# Altium PCB hd-gs.PcbDoc
Units mil, origin at the board's own origin, x right, y up, seen from the top; angles counter-clockwise.
Board outline 1400 x 650 mil, 6 copper layers (Top, 2-GND, 3-SIG, 4-SIG, 5-GND, Bottom), stack 46.142 mil thick; 60 components, 39 nets, 225 pads, 132 vias.
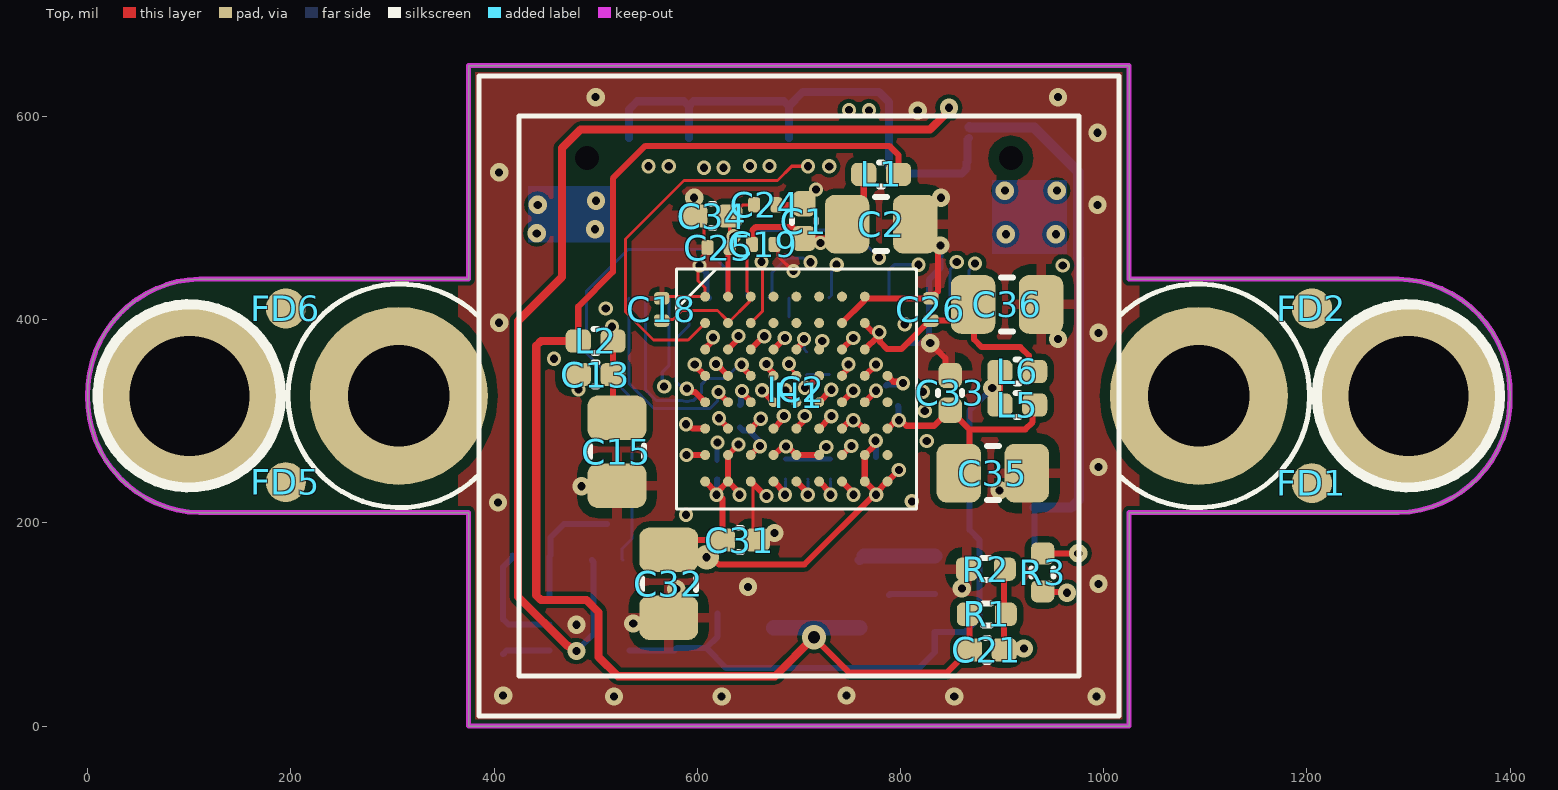
[diagram p0: Top view]
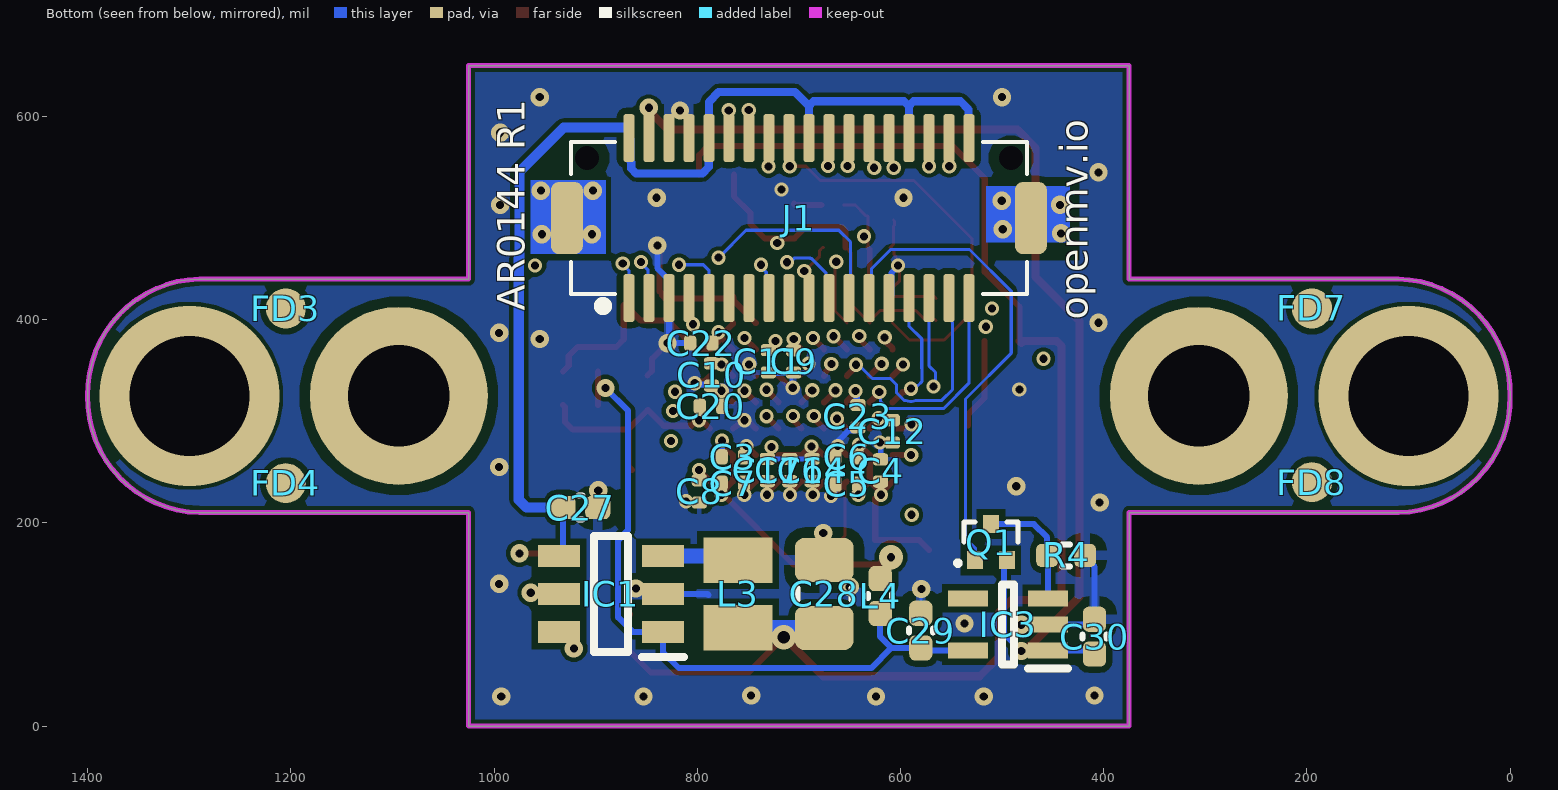
[diagram p1: Bottom view, seen from below]
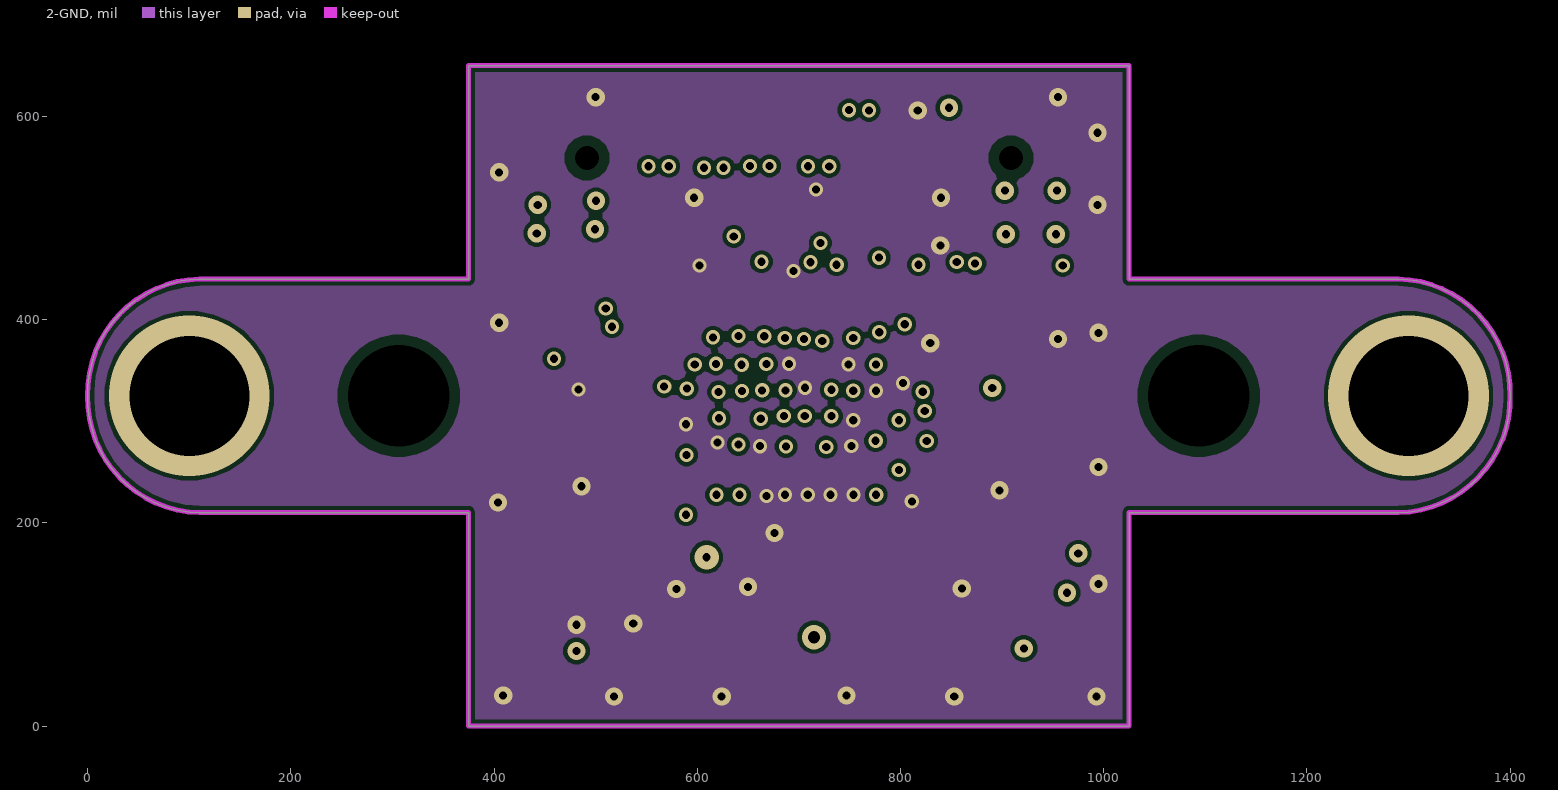
[diagram p2: 2-GND]
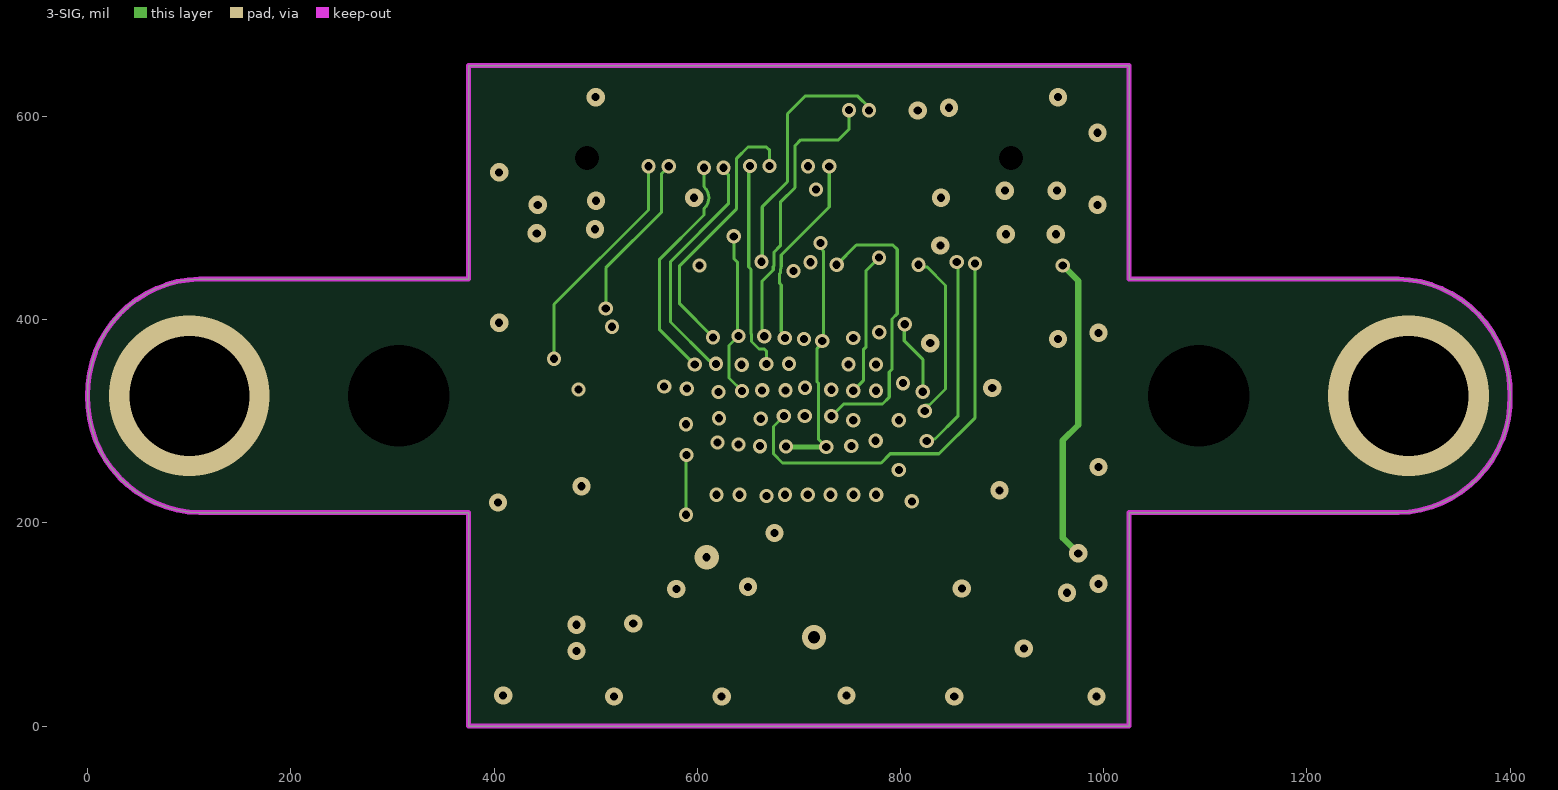
[diagram p3: 3-SIG]
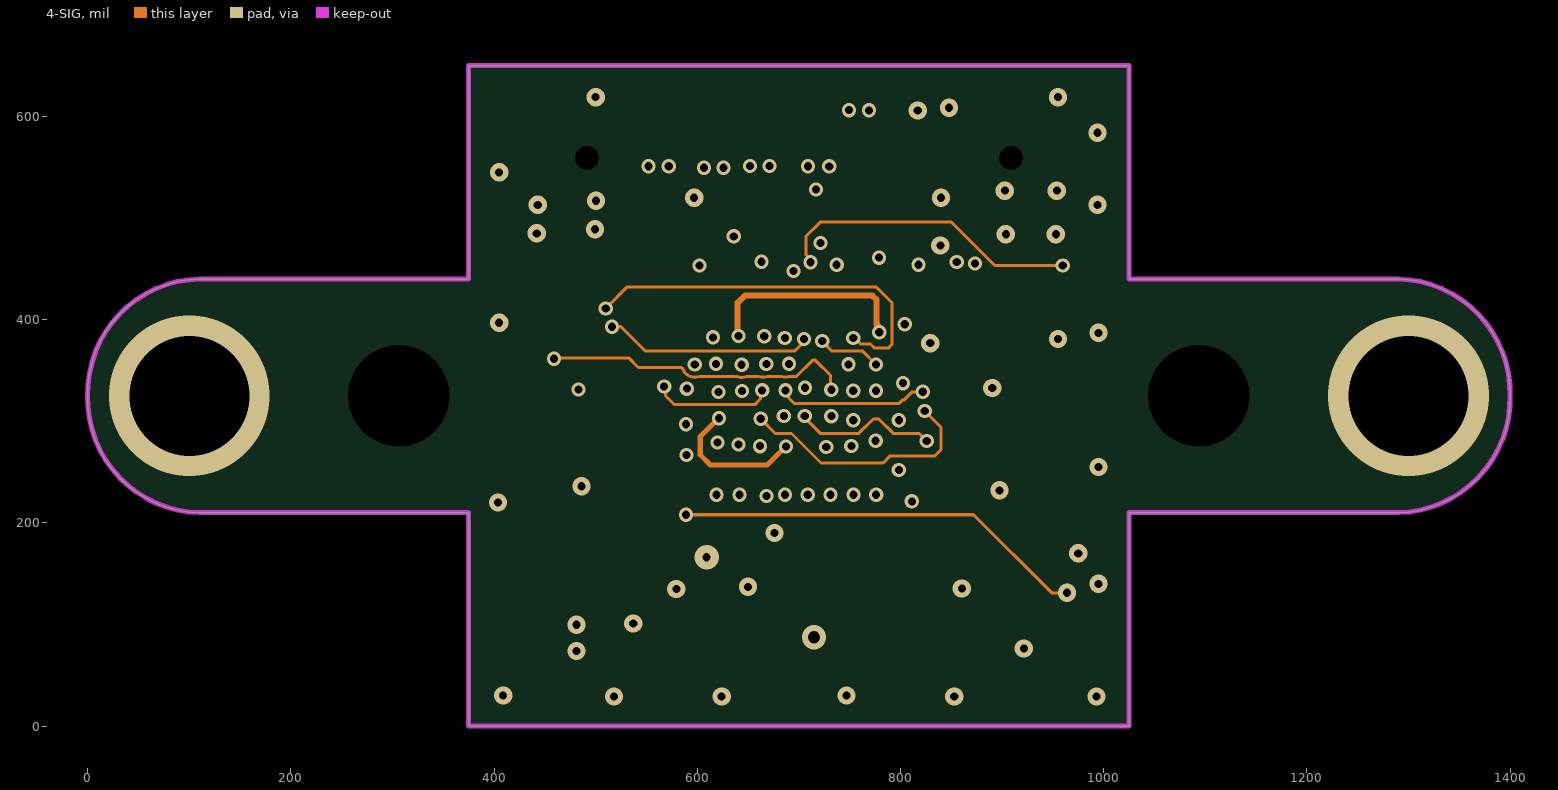
[diagram p4: 4-SIG]
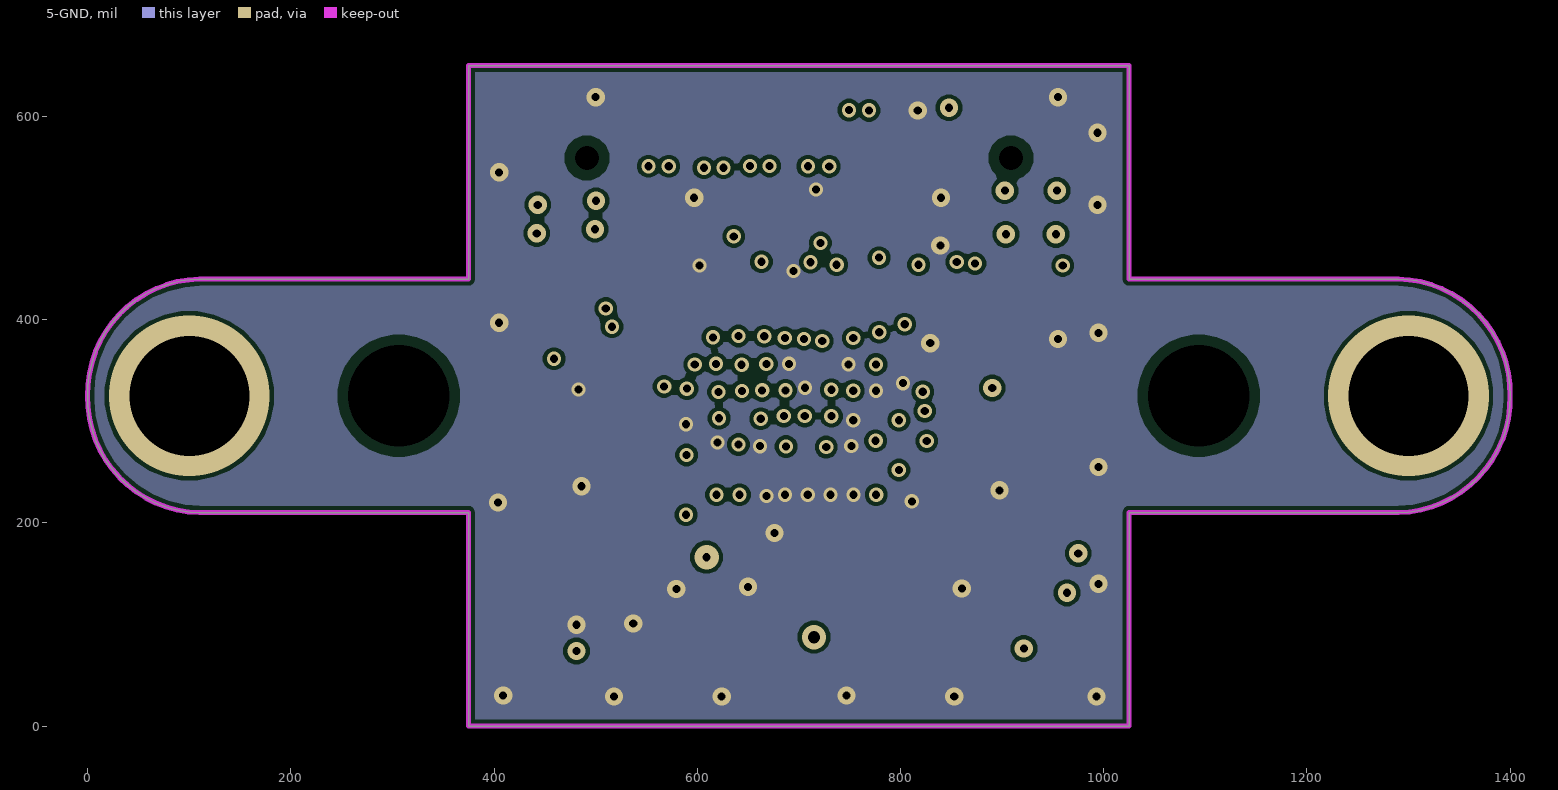
[diagram p5: 5-GND]
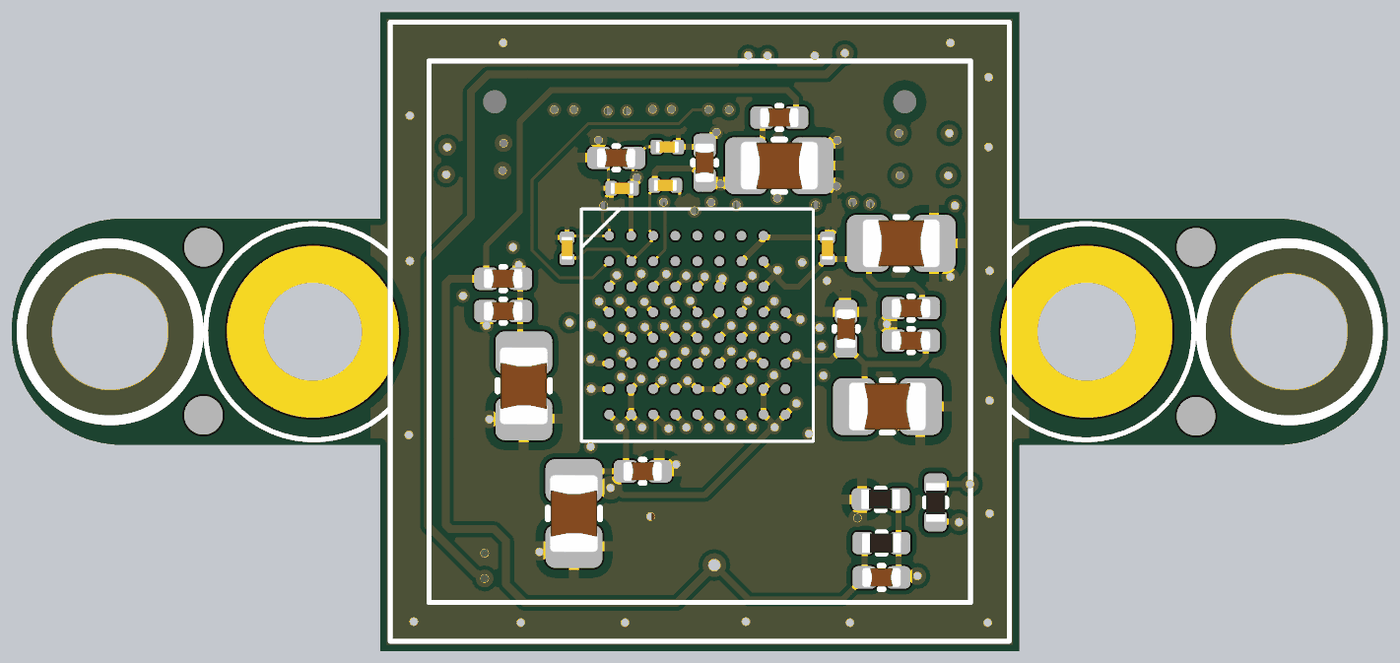
[diagram p6: 3D render of the assembled board from above, using the file's embedded part models]
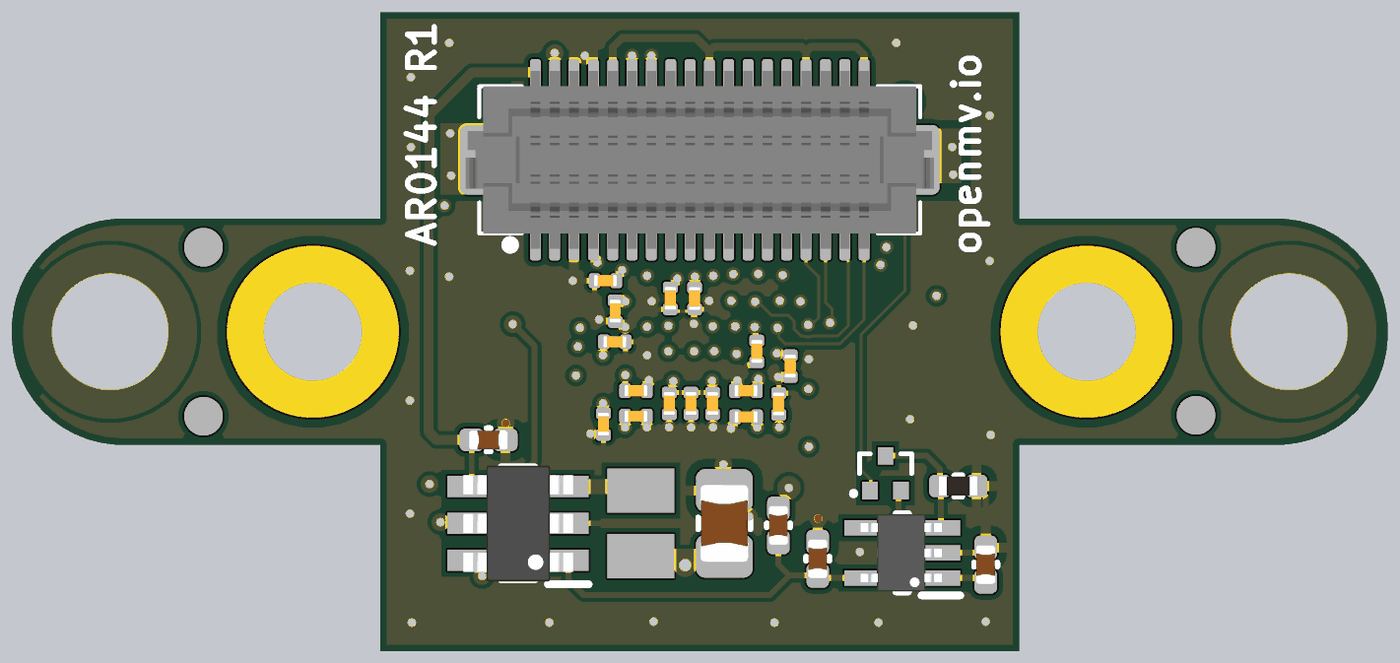
[diagram p7: 3D render of the assembled board from below, using the file's embedded part models]

## Layer stack, top to bottom
Top Solder: solder mask 0.4, Solder Resist, Dk 3.5
Top: signal copper 1.378
Dielectric 2: prepreg 5, PP-006, Dk 4.1
2-GND: signal copper 1.378
Dielectric 4: prepreg 10, PP-006, Dk 4.1
3-SIG: signal copper 1.378
Dielectric 1: dielectric 7.874, FR-4, Dk 4.8
4-SIG: signal copper 1.378
Dielectric 5: prepreg 10, PP-006, Dk 4.1
5-GND: signal copper 1.378
Dielectric 3: prepreg 5, PP-006, Dk 4.1
Bottom: signal copper 1.378
Bottom Solder: solder mask 0.4, Solder Resist, Dk 3.5

## Board outline
1290.03,210 1025.03,210 1025.03,0 375.03,0 375.03,210 110.03,210 cw(c112.53,322.5) 0.03,325 cw(c112.53,327.5) 110.03,440 375.03,440 375.03,650 1025.03,650 1025.03,440 1290.03,440 cw(c1287.53,327.5) 1400.03,325 cw(c1287.53,322.5)

## Design rules (kind name [scope] priority, off if disabled: settings)
BoardOutlineClearance mdCopperDimension [All] p1: gap=4 ignorepadtopadclearanceinfootprint=FALSE
Clearance [All] p1: gap=4 ignorepadtopadclearanceinfootprint=FALSE except(6: SMDPad-Fill SMDPad-Poly SMDPad-Region; 10: THPad-Fill THPad-Poly THPad-Region)
ComponentClearance "cam mount" [InComponent('H1')] p1: gap=0 collisioncheckmode=3 verticalgap=0 showdistances=FALSE
ComponentClearance [All] p2: gap=5 collisioncheckmode=3 verticalgap=5 showdistances=FALSE
HoleSize [All] p1: absolutevalues=TRUE maxlimit=100000 minlimit=4 maxpercent=80.000 minpercent=20.000
HoleToHoleClearance mdDrill [All] p1: gap=3 allowstackedmicrovias=TRUE
MinimumSolderMaskSliver [All] p1 off: minsoldermaskwidth=10
PasteMaskExpansion Expansion_SMDPaste_OFF [InPadClass('SMDPaste_OFF')] p1: expansion=0
PasteMaskExpansion mlMinCreamFrame [All] p2: expansion=0
PolygonConnect 0201 [HasFootprint('C0201')] p1: thpad.connectstyle=Relief thpad.reliefconductorwidth=5 thpad.reliefentries=4 thpad.polygonreliefangle="90 Angle" thpad.airgapwidth=5 smdpad.connectstyle=Relief smdpad.reliefconductorwidth=5 smdpad.reliefentries=4 smdpad.polygonreliefangle="90 Angle" smdpad.airgapwidth=5 via.connectstyle=Direct via.reliefconductorwidth=10 via.reliefentries=4 via.polygonreliefangle="90 Angle" via.airgapwidth=10
PolygonConnect [All] p2: thpad.connectstyle=Relief thpad.reliefconductorwidth=10 thpad.reliefentries=4 thpad.polygonreliefangle="90 Angle" thpad.airgapwidth=10 smdpad.connectstyle=Relief smdpad.reliefconductorwidth=10 smdpad.reliefentries=4 smdpad.polygonreliefangle="90 Angle" smdpad.airgapwidth=10 via.connectstyle=Direct via.reliefconductorwidth=10 via.reliefentries=4 via.polygonreliefangle="90 Angle" via.airgapwidth=10
RoutingVias [All] p1: holewidth=8 width=14 viastyle="Through Hole" minholewidth=8 minwidth=14 maxholewidth=100 maxwidth=100
SolderMaskExpansion mlMinStopFrame [All] p1: expansion=2 istentingtop=FALSE
Width [All] p1: maxlimit=100 minlimit=3 preferedwidth=4
25 further rules are at their usual default settings.

## Classes and differential pairs
pad class SMDPaste_OFF: FD1-1 FD2-1 FD3-1 FD4-1 FD5-1 FD6-1 FD7-1 FD8-1 J1-1 J1-2 J1-3 J1-4 J1-5 J1-6 J1-7 J1-8 J1-9 J1-10 J1-11 J1-12 J1-13 J1-14 J1-15 J1-16 J1-17 J1-18 J1-19 J1-20 J1-21 J1-22 J1-23 J1-24 J1-25 J1-26 J1-27 J1-28 J1-29 J1-30 J1-31 J1-32 J1-33 J1-34 J1-35 J1-36

## Components (designator, comment, footprint, x,y, rotation, side; value= is the part's Value field where it differs from the comment)
C1 "4.7uF" 0402 705,497 r270 top
C2 "22uF" 0805 781,494 r180 top
C3 "0.22uF" C0201 765,265 r180 bottom
C4 "0.22uF" C0201 619.66,251.51 r90 bottom
C5 "0.22uF" C0201 652.86,238.35 r0 bottom
C6 "0.22uF" C0201 653,265 r0 bottom
C7 "0.22uF" C0201 765,239 r180 bottom
C8 "0.22uF" C0201 798,231 r270 bottom
C9 "0.22uF" C0201 705.26,358.86 r270 bottom
C10 "0.22uF" C0201 786,346 r270 bottom
C11 "0.22uF" C0201 730,359 r270 bottom
C12 "0.22uF" C0201 608,290 r270 bottom
C13 "4.7uF" 0402 500,346 r0 top
C14 "0.22uF" C0201 687,252 r270 bottom
C15 "22uF" 0805 521,270 r90 top
C16 "0.22uF" C0201 709,252 r270 bottom
C17 "0.22uF" C0201 731,252 r270 bottom
C18 "0.22uF" C0201 565.03,410 r90 top
C19 "0.22uF" C0201 665,474 r0 top
C20 "0.22uF" C0201 786.55,314.73 r180 bottom
C21 "6.8pF" 0402 885,75 r0 top
C22 "0.22uF" C0201 796,377 r0 bottom
C23 "0.22uF" C0201 642,305 r270 bottom
C24 "0.22uF" C0201 667,513 r0 top
C25 "0.22uF" C0201 621,471 r180 top
C26 "0.22uF" C0201 830.03,410 r90 top
C27 "4.7uF" 0402 915,215 r0 bottom
C28 "22uF" 0805 675,130 r270 bottom
C29 "4.7uF" 0402 580,94 r270 bottom
C30 "4.7uF" 0402 409,88 r270 bottom
C31 "4.7uF" 0402 642,183 r180 top
C32 "22uF" 0805 572,140 r90 top
C33 "4.7uF" 0402 849,328 r270 top
C34 "4.7uF" 0402 615,502 r0 top
C35 "22uF" 0805 890.95,248.92 r180 top
C36 "22uF" 0805 905,415 r180 top
FD1 "FIDUCIAL1X2" FIDUCIAL-1X2 1205.03,239 r0 top
FD2 "FIDUCIAL1X2" FIDUCIAL-1X2 1205.03,411 r0 top
FD3 "FIDUCIAL1X2" FIDUCIAL-1X2 1205.03,411 r180 bottom
FD4 "FIDUCIAL1X2" FIDUCIAL-1X2 1205.03,239 r180 bottom
FD5 "FIDUCIAL1X2" FIDUCIAL-1X2 195.03,240 r0 top
FD6 "FIDUCIAL1X2" FIDUCIAL-1X2 195.03,411 r0 top
FD7 "FIDUCIAL1X2" FIDUCIAL-1X2 195.03,411 r180 bottom
FD8 "FIDUCIAL1X2" FIDUCIAL-1X2 195.03,240 r180 bottom
H1 "LENSMOUNT20MM" LENSMOUNT-20MM 700.03,325 r0 top locked
IC1 "TLV62568PDDCR" SOT95P280X110-6N 885,130 r0 bottom
IC2 "AR0144CSSC20SUKA0" AR0144CSSC20SUKA0 697.59,331.73 r0 top locked
IC3 "MIC5365-2.8YC5-TR" SOT65P210X110-5N 494.03,100 r0 bottom
J1 "DF12-36-DP" DF12-36-DP 700.03,500 r0 bottom locked
L1 "100" 0402 781,543 r0 top
L2 "100" 0402 500,379 r180 top
L3 "MAKK2016T2R2M" INDC2016X100N 760,130 r90 bottom
L4 "100" 0402 620,128 r270 bottom
L5 "100" 0402 915,316 r180 top
L6 "100" 0402 915,349 r180 top
Q1 "SSM3J15FV,L3F" SSM3J15FV 511,181 r180 bottom
R1 "100K" R0402 885,110 r180 top
R2 "100K" R0402 884.1,154.41 r180 top
R3 "10K" R0402 940,151.3 r90 top
R4 "100K" R0402 437,168 r180 bottom

## Footprints (in the part's own frame and the unit in brackets; to place one, negate y for a bottom-side part, rotate by r counter-clockwise, add the part's x,y. Pads: shape width x height; smd on the part's side, far side on the other; paste and mask are expansions set on the pad)
0402 [mm] "Chip Capacitor, 2-Leads, Body  0402 (in) 1005 (mm), IPC Medium Density"
  rrect52% 0.63x0.58 smd mask+0.05: 1(-0.435,0) 2(0.435,0)
  silkscreen extent -0.05,-0.3 0.05,0.3, body extent -0.5,-0.25 0.5,0.25, height 0.5
0805 [mm] "Chip Capacitor, Body 0805 imperial, 2.0x1.2mm, IPC Medium Density"
  rrect45% 1.11x1.47 smd: 1(-0.85,0) 2(0.85,0)
  silkscreen extent -0.15,-0.67 0.15,0.67, body extent -1,-0.62 1,0.63, height 1.25
AR0144CSSC20SUKA0 [mm] "AR0144CSSC20SUKA0"
  rrect100% 0.25x0.25 smd: P$1(-2.28,2.31) P$2(-1.71,2.31) P$3(-1.14,2.31) P$4(-0.57,2.31) P$5(0,2.31) P$6(0.57,2.31) P$7(1.14,2.31) P$8(1.71,2.31) P$9(-2.28,1.65) P$10(-1.71,1.65) P$11(-1.14,1.65) P$12(-0.57,1.65) P$13(0,1.65) P$14(0.57,1.65) P$15(1.14,1.65) P$16(1.71,1.65) P$17(-2.28,0.99) P$18(-1.71,0.99) P$19(-1.14,0.99) P$20(-0.57,0.99) P$21(0,0.99) P$22(0.57,0.99) P$23(1.14,0.99) P$24(1.71,0.99) P$25(-2.28,0.33) P$26(-1.71,0.33) P$27(-1.14,0.33) P$28(-0.57,0.33) P$29(0,0.33) P$30(0.57,0.33) P$31(1.14,0.33) P$32(1.71,0.33) P$33(2.28,0.33) P$34(-2.28,-0.33) P$35(-1.71,-0.33) P$36(-1.14,-0.33) P$37(-0.57,-0.33) P$38(0,-0.33) P$39(0.57,-0.33) P$40(1.14,-0.33) P$41(1.71,-0.33) P$42(2.28,-0.33) P$43(-2.28,-0.99) P$44(-1.71,-0.99) P$45(-1.14,-0.99) P$46(-0.57,-0.99) P$47(0,-0.99) P$48(0.57,-0.99) P$49(1.14,-0.99) P$50(1.71,-0.99) P$51(2.28,-0.99) P$52(-2.28,-1.65) P$53(-1.71,-1.65) P$54(-1.14,-1.65) P$55(-0.57,-1.65) P$56(0,-1.65) P$57(0.57,-1.65) P$58(1.14,-1.65) P$59(1.71,-1.65) P$60(2.28,-1.65) P$61(-2.28,-2.31) P$62(-1.71,-2.31) P$63(-1.14,-2.31) P$64(-0.57,-2.31) P$65(0,-2.31) P$66(0.57,-2.31) P$67(1.14,-2.31) P$68(1.71,-2.31) P$69(2.28,-2.31)
  silkscreen extent -3,-3 3,3, body extent -3,-3 3,3, height 1
C0201 [mil] "0201 IPC-7351"
  rrect50% 12x15 smd mask+1.97: 1(-11,0) 2(11,0)
  body extent -12,-6 12,6, height 14
DF12-36-DP [mm] "36 Position Connector Receptacle, Center Strip Contacts Surface Mount Gold"
  rrect50% 0.8x1.8 smd mask+0.05: 0(-5.8,0) 0(5.8,0)
  rrect50% 0.28x1.2 smd mask+0.05: 1(4.25,2) 2(4.25,-2) 3(3.75,2) 4(3.75,-2) 5(3.25,2) 6(3.25,-2) 7(2.75,2) 8(2.75,-2) 9(2.25,2) 10(2.25,-2) 11(1.75,2) 12(1.75,-2) 13(1.25,2) 14(1.25,-2) 15(0.75,2) 16(0.75,-2) 17(0.25,2) 18(0.25,-2) 19(-0.25,2) 20(-0.25,-2) 21(-0.75,2) 22(-0.75,-2) 23(-1.25,2) 24(-1.25,-2) 25(-1.75,2) 26(-1.75,-2) 27(-2.25,2) 28(-2.25,-2) 29(-2.75,2) 30(-2.75,-2) 31(-3.25,2) 32(-3.25,-2) 33(-3.75,2) 34(-3.75,-2) 35(-4.25,2) 36(-4.25,-2)
  round 0 hole 0.6 unplated: MH1(-5.3,-1.5) MH2(5.3,-1.5)
  silkscreen extent -5.7,-1.9 5.7,2.3, body extent -6.05,-2.3 6.05,2.3, height 2.3
FIDUCIAL-1X2 [mm] "FIDUCIAL-1X2"
  rrect100% 1x1 smd paste+0: 1(0,0)
INDC2016X100N [mm] "INDC2016X100N"
  rect 1.14x1.73 smd: 1(-0.847,0) 2(0.847,0)
  body extent -1,-0.8 1,0.8, height 1
LENSMOUNT-20MM [mil] "LENSMOUNT-20MM"
  round 175 / inner round 0 / far side round 175 hole 100: P$1(-393.7,0) P$2(393.7,0)
  silkscreen extent -503,-315 503,315
R0402 [mm] "Chip Resistor, 2-Leads, Body  0402 (in) 1005 (mm), IPC Medium Density"
  rrect51% 0.55x0.58 smd mask+0.05: 1(-0.475,0) 2(0.475,0)
  silkscreen extent -0.1,-0.28 0.1,0.28, body extent -0.5,-0.25 0.5,0.25, height 0.34
SOT65P210X110-5N [mm] "SOT65P210X110-5N"
  rect 1x0.4 smd: 1(-1,0.65) 2(-1,0) 3(-1,-0.65) 4(1,-0.65) 5(1,0.65)
  silkscreen extent -1.5,-1 0.15,1.1, body extent -1.02,-1 1.07,1, height 0.96
SOT95P280X110-6N [mil] "SOT95P280X100-6N"
  rect 41.34x21.65 smd: 1(-51.18,37.4) 2(-51.18,0) 3(-51.18,-37.4) 4(51.18,-37.4) 5(51.18,0) 6(51.18,37.4)
  silkscreen extent -72,-57 17,62, body extent -56,-59 56,59, height 44
SSM3J15FV [mm]
  rect 0.4x0.45 smd: 1(-0.4,-0.45) 2(0.4,-0.45) 3(0,0.45)
  silkscreen extent -0.88,-0.58 0.67,0.5, body extent -0.6,-0.6 0.6,0.6, height 0.6

## Part data
C1 C13 C27 C29 C30 C31 C33 C34: library part CAP_0402, "0402 (1005 Metric) Nick Garner - TeleSense", MPN=JMK105BBJ475MV-F, DeviceSetName=CAP_0402, GateName_1=G$1, LibraryName=0402, SymbolName_1=CAP
C2 C15 C28 C32 C35 C36: library part 22UF-0805-6.3V-20%, "22ÂµF ceramic capacitors    A capacitor is a passive two-terminal electrical component used to store electrical energy temporarily in an electric field.", MPN=CL21A226MQQNNNE, DeviceName=-0805-6.3V-20%, DeviceSetName=22UF, GateName_1=G$1, LibraryName=SparkFun-Capacitors, PROD_ID=CAP-08402, SymbolName_1=CAP
C3 C4 C5 C6 C7 C8 C9 C10 C11 C12 C14 C16 C17 C18 C19 C20 C22 C23 C24 C25 C26: library part C-EUC0201, "CAPACITOR, European symbol", MPN=GRM033R60J224ME15D, DeviceName=C0201, DeviceSetName=C-EU, GateName_1=G$1, LibraryName=rcl, POPULARITY=0, SPICEPREFIX=C, SymbolName_1=C-EU
C21: library part CAP_0402, "0402 (1005 Metric) Nick Garner - TeleSense", MPN=GRM1555C1H6R8DA01D, DeviceSetName=CAP_0402, GateName_1=G$1, LibraryName=0402, SymbolName_1=CAP
FD1 FD2 FD3 FD4 FD5 FD6 FD7 FD8: "Fiducial Alignment Points    Point-of-reference for pick-and-place machines and other optical instruments.", DeviceName=1X2, DeviceSetName=FIDUCIAL, GateName_1=G$1, LibraryName=SparkFun-Aesthetics, SymbolName_1=FIDUCIAL
IC1: "2.5V-5.5V input, 1A high efficiency step-down buck converter in SOT23 and SOT563 package   Source:  Datasheet", MANUFACTURER_NAME="Texas Instruments", DeviceSetName=TLV62568PDDCR, GateName_1=G$1, HEIGHT=1.1mm, LibraryName=TLV62568PDDCR, MANUFACTURER_PART_NUMBER=TLV62568PDDCR, MOUSER_PART_NUMBER=595-TLV62568PDDCR, MOUSER_PRICE-STOCK=https://www.mouser.co.uk/ProductDetail/Texas-Instruments/TLV62568PDDCR?qs=1mbolxNpo8f1FPchIXcxyQ%3D%3D, MPN=TLV62568PDDCR, SymbolName_1=TLV62568PDDCR
IC2: MPN=AR0144CSSC20SUKA0-CRBR, DeviceSetName=AR0144CSSC20SUKA0, GateName_1=G$1, LibraryName=AR0144CSSC20SUKA0, SymbolName_1=AR0144CSSC20SUKA0
IC3: "IC REG LINEAR 2.8V 150MA SC70-5   Source:  Datasheet", MANUFACTURER_NAME=Microchip, DeviceSetName=MIC5365-2.8YC5-TR, GateName_1=G$1, HEIGHT=1.1mm, LibraryName=MIC5365-2.8YC5-TR, MANUFACTURER_PART_NUMBER=MIC5365-2.8YC5-TR, MOUSER_PART_NUMBER=998-MIC5365-2.8YC5TR, MOUSER_PRICE-STOCK=https://www.mouser.co.uk/ProductDetail/Microchip-Technology-Atmel/MIC5365-2.8YC5-TR?qs=U6T8BxXiZAX3mJDSWJyjVA%3D%3D, MPN=MIC5365-2.8YC5-TR, SymbolName_1=MIC5365-2.8YC5-TR
J1: MPN=DF12NB(3.0)-36DP-0.5V(51), DeviceSetName=DF12-36-DP, GateName_1=G$1, LibraryName=DF12NB(3.0)-36DP-0.5V(51), SymbolName_1=DF12-36
L1 L2 L4 L5 L6: library part INDUCTOR_0402, MPN=MFBM1V1005-101-R, DeviceSetName=INDUCTOR_0402, GateName_1=G$1, LibraryName=0402, SymbolName_1=INDUCTOR
L3: "INDUCTOR, METAL CORE Check availability", PACKAGE="2016 Taiyo Yuden", AVAILABILITY="In Stock", DeviceSetName=MAKK2016T2R2M, GateName_1=G$1, LibraryName=MAKK2016T2R2M, MF="Taiyo Yuden", MP=MAKK2016T2R2M, MPN=MAKK2016T2R2M, PRICE=None, PURCHASE-URL=https://pricing.snapeda.com/search/part/MAKK2016T2R2M/?ref=eda, SymbolName_1=MAKK2016T2R2M
Q1: library part PMXB120EPEZ, "MOSFET 30 V, P-channel Trench MOSFET   Source:  Datasheet", DeviceSetName=SSM3J15FV,L3F, GateName_1=G$1, HEIGHT=0.4mm, LibraryName=SSM3J15FV,L3F, MANUFACTURER_PART_NUMBER=SSM3J15FV,L3F, MPN=SSM3J15FV,L3F, SymbolName_1=SSM3J15FV,L3F
R1 R2 R4: library part R-US_R0402, "RESISTOR, American symbol", MPN=AC0402FR-07100KL, DeviceName=R0402, DeviceSetName=R-US_, GateName_1=G$1, LibraryName=rcl, POPULARITY=34, SPICEPREFIX=R, SymbolName_1=R-US
R3: library part R-US_R0402, "RESISTOR, American symbol", MPN=AC0402FR-1310KL, DeviceName=R0402, DeviceSetName=R-US_, GateName_1=G$1, LibraryName=rcl, POPULARITY=34, SPICEPREFIX=R, SymbolName_1=R-US
H1: DeviceName=20MM, DeviceSetName=LENSMOUNT, GateName_1=G$1, LibraryName=lensmount, SymbolName_1=LENS

## Via types
v1: diameter 14, hole 8, Top to Bottom, tented both sides, 84 vias
v2: diameter 18, hole 8, Top to Bottom, tented both sides, 44 vias
v3: diameter 177.17/158.11/158.11/158.11/158.11/177.17 (per signal layer), hole 118.11, Top to Bottom, 2 vias
v4: diameter 24, hole 12, Top to Bottom, tented both sides, 1 vias
v5: diameter 24, hole 8, Top to Bottom, tented both sides, 1 vias

## Nets (pads, with @x,y where several pads share a name; then routed paths per layer and width w, separated by ;. In a path a pad name is that pad's centre, name@x,y a point inside that pad or via, vN(x,y) a via of type N, cw(c..) or ccw(c..) an arc to the next point about the centre after c; other vN are vias at no path point)
DCMI_CLK: IC2.P$11 J1.12 | length 316.8
  Top w3: IC2.P$11 664.45,408.43 664.45,455.73 v1(663.22,456.96)
  3-SIG w3: v1(663.22,456.96) 664,457.74 664,511 688.77,535.77 688.77,602.56 706.13,619.92 758.08,619.92 769,609 v1(769,606)
DCMI_D0: IC2.P$47 J1.3 | length 390.4
  Top w6: IC2.P$47 698.62,293.78 698.62,294.22 704.28,299.88 704.28,303.58 v1(705.81,305.11)
  3-SIG w3: v1(825.89,280.5) 827.99,282.6 833.94,282.6 856.77,305.44 856.77,455.49 v1(855.49,456.77)
  4-SIG w3: v1(705.81,305.11) 705.81,303.41 721.1,288.12 759.12,288.12 773,302 779,302 792.88,288.12 818.27,288.12 v1(825.89,280.5)
  Bottom w3: J1.3 848.64,422.24 848.64,449.22 855.49,456.06 v1(855.49,456.77)
DCMI_D1: IC2.P$46 J1.1 | length 466.8
  Top w6: IC2.P$46 683.73,301.34 683.73,303.6 v1(685.26,305.13)
  3-SIG w3: v1(685.26,305.13) 675,294.87 675,268 684,259 781,259 790,268 838,268 873.57,303.57 873.57,455 v1(873.42,455.15)
  Bottom w3: J1.1 867.35,448.31 873.42,454.38 v1(873.42,455.15)
DCMI_D2: IC2.P$45 J1.9 | length 482.3
  Top w6: IC2.P$45 662.38,302.43 v1(662.51,302.43)
  3-SIG w3: v1(817.89,454.06) 819.99,451.96 826.07,451.96 844.43,433.6 844.43,331.79 828.64,316 v1@824,316
  4-SIG w3: v1@662.51,302.69 v1(662.51,302.43) 676.93,288 692.88,288 721.88,259 783,259 790,266 834,266 840,272 840,294 v1(824,310)
  Bottom w3: J1.9 788.61,448.61 794.06,454.06 v1(817.89,454.06)
DCMI_D3: IC2.P$38 J1.7 | length 238.2
  Top w6: v1(686.81,330.42) 686.81,329.51 IC2.P$38
  3-SIG w3: v1(804.22,395.5) 803.77,395.05 803.77,379.23 822,361 v1(822,329)
  4-SIG w3: v1(686.81,330.42) 686.81,327.44 689.83,324.42 689.83,323.17 695.34,317.66 738.16,317.66 738.35,317.47 781.18,317.47 781.37,317.66 798.78,317.66 802.24,321.13 803.76,321.13 811.63,329 v1(822,329)
DCMI_D4: IC2.P$37 J1.31 | length 225
  Top w6: v1(663.91,330.42) 663.91,329.98 IC2.P$37
  4-SIG w3: v1(567.44,334.19) 568.76,332.88 568.76,325.24 577.63,316.37 656.63,316.37 662.16,321.9 662.16,328.67 v1(663.91,330.42)
  Bottom w3: v1(567.44,334.19) 565.58,336.06 565.58,348.2 572.08,354.7 J1.31
DCMI_D5: IC2.P$34 J1.29 | length 124.8
  Top w6: v1(589.77,332.07) 591.93,332.07 595.3,328.7 597.87,328.7 IC2.P$34
  Bottom w3: v1(589.77,332.07) 586.79,332.07 583.6,335.26 582.7,335.26 579,338.96 579,351.72 579.08,351.8 579.08,381.07 591.76,393.76 J1.29
DCMI_D6: IC2.P$35 J1.35 | length 207.9
  Top w6: v1(620.91,328.87) 620.91,328.17 630.27,318.82 IC2.P$35
  Bottom w3: J1.35 532.7,337.3 557.43,312.57 612.69,312.57 619.82,319.7 619.82,327.77 v1(620.91,328.87)
DCMI_D7: IC2.P$25 J1.28 | length 244.4
  Top w6: v1@596.74,355.81 IC2.P$25
  3-SIG w3: v1@596.6,355.81 596.6,356.56 562.65,390.5 562.65,459.08 606.64,503.07 606.64,509.14 607.01,509.51 ccw(c597,520) 607.01,530.49 606.64,530.86 v1(606.64,549.5)
  other v1: 597.6,355.81
DCMI_D8: IC2.P$26 J1.26 | length 256.2
  Top w6: v1(618.54,356.5) IC2.P$26
  3-SIG w3: v1(618.54,356.5) 615.56,356.5 612.46,359.6 611.82,359.6 573.65,397.77 573.65,457.08 631,514.43 631,542.24 625.9,547.34 v1(625.9,549.5)
DCMI_D9: IC2.P$27 J1.33 | length 223.9
  Top w6: v1@641.62,355.81 IC2.P$27
  Bottom w3: J1.33 549.34,418.21 549.34,397.77 548.87,397.29 548.87,331.04 559.33,320.58 584.85,320.58 ccw(c589.77,332.07) 594.69,320.58 596.58,320.58 604,328 604,336 610,342 627.67,342 v1@641.48,355.81
  other v1: 643.73,355.56
DCMI_D10: IC2.P$28 J1.24 | length 220.4
  Top w6: v1(668.04,356.46) 668.04,354.3 674.41,347.93 674.41,345.45 IC2.P$28
  3-SIG w3: v1(652,551.35) 650.72,550.07 650.72,451.78 653,449.5 653,386.06 653.44,385.62 653.44,378.52 660.77,371.2 661.8,371.2 662,371 666.29,371 668.04,369.24 v1(668.04,356.46)
DCMI_D11: IC2.P$17 J1.22 | length 282.1
  Top w6: IC2.P$17 607.83,371.75 614.03,377.95 614.03,381.08 v1(615.56,382.61)
  3-SIG w3: v1(615.56,382.61) 582.65,415.52 582.65,453.08 638.82,509.25 638.82,558.82 650,570 668,570 671.24,566.76 v1(671.24,551.29)
DCMI_FSIN: IC2.P$40 J1.23 | length 358.9
  Top w6: IC2.P$40 v1@753.56,329.83
  3-SIG w3: v1(753.56,329.97) 763.5,339.91 763.5,370.5 766.29,373.29 766.29,448.29 v1(779,461)
  Bottom w3: J1.23 649.21,422.86 649.21,476.54 660.67,488 752,488 v1(779,461)
DCMI_HSYNC: IC2.P$9 J1.18 | length 377.8
  Top w3: IC2.P$9 591.14,380 557,380 529.44,407.56 529.44,479.44 587,537 679,537 693,551 v1(709,551)
DCMI_PCLK: IC2.P$19 J1.14 | length 299.1
  Top w6: IC2.P$19 665.7,383.7 v1(665.94,383.7)
  3-SIG w3: v1(665.94,383.7) 663.84,385.8 663.84,390.92 663.8,390.96 663.8,437.8 674.85,448.85 674.85,449.12 cw(c681.85,449.16) 674.85,449.19 674.85,452.06 675.56,452.77 cw(c708.16,443.17) 675.72,453.3 675.72,466.62 681.85,472.75 681.85,515.55 696.26,529.96 696.26,571.26 702,577 739,577 749.35,587.35 v1@749.35,606.18
  other v1: 749.33,606.21
DCMI_PWDN: J1.25 Q1.1 | length 480
  Bottom w3: Q1.1 526,164.03 526,174.55 536,184.55 536,322 491,367 491,428 532,469 609.58,469 628.63,449.95 628.63,423.76 J1.25
DCMI_RST: J1.21 R3.2 | length 712.8
  Top w6: R3.2 v2(975,170)
  3-SIG w6: v1(959.76,453.33) 974.99,438.11 974.99,296.33 959.76,281.11 959.76,185.24 v2(975,170)
  4-SIG w3: v1(711.61,456.51) 711.61,459.15 707,463.77 707,482 721,496 850.25,496 892.91,453.33 v1(959.76,453.33)
  Bottom w3: J1.21 673.53,424.29 673.53,446.23 687.3,460 688.32,460 688.82,460.5 704.65,460.5 708.64,456.51 v1(711.61,456.51)
DCMI_SCL: IC2.P$23 J1.32 | length 563
  Top w6: IC2.P$23 v1@753.56,381.8
  3-SIG w3: v1(510,411) 510,450.94 564.74,505.68 564.74,543.74 v1(572,551)
  4-SIG w3: v1(510,411) 531.24,432.24 776.01,432.24 791.66,416.58 791.66,375.66 788,372 774.63,372 770.63,376 760.82,376 754.88,381.94 v1(753.56,381.94)
DCMI_SDA: IC2.P$39 J1.34 | length 552.6
  Top w6: IC2.P$39 v1@731.12,329.83
  3-SIG w3: v1(459.13,361.52) 459.13,415.13 552,508 v1(552,551)
  4-SIG w3: v1(459.13,361.52) 459.98,362.38 532.62,362.38 542,353 584.03,353 584.72,352.6 cw(c583.23,350) 586.01,351.13 ccw(c597.6,355.81) 593.53,343.99 ccw(c597.6,355.81) 601.69,344 638.97,344 ccw(c643.73,355.56) 648.5,344 660.83,344 ccw(c664.92,355.81) 669.01,344 683.36,344 ccw(c686.95,355.97) 690.55,344 697.6,344 713.74,360.14 716.23,360.14 731.12,345.25 v1@731.12,329.97
  other v1: 732,331
DCMI_VSYNC: IC2.P$20 J1.16 | length 206.7
  Top w6: IC2.P$20 v1@686.24,381.8
  3-SIG w3: v1(686.24,381.94) 686.24,384.92 682.72,388.44 682.72,434.17 681.17,435.71 681.17,443.17 681.17,445.28 681.85,445.95 681.85,449.16 cw(c708.16,443.17) 682.72,452.17 682.72,463.72 729.94,510.94 v1(729.94,550.88)
GND: C1.1 C2.1 C3.2 C4.2 C5.2 C6.2 C7.2 C8.2 C9.2 C10.2 C11.2 C12.2 C13.1 C14.2 C15.1 C16.2 C17.2 C18.2 C19.2 C20.2 C22.2 C23.2 C24.2 C25.2 C26.2 C27.1 C28.1 C29.1 C30.1 C31.1 C32.1 C33.1 C34.1 C35.1 C36.1 IC1.2 IC2.P$1 IC2.P$8 IC2.P$15 IC2.P$29 IC2.P$30 IC2.P$31 IC2.P$33 IC2.P$41 IC2.P$43 IC2.P$49 IC2.P$50 IC2.P$54 IC2.P$58 IC2.P$63 IC2.P$64 IC2.P$65 IC2.P$66 IC2.P$67 IC3.2 J1.5 J1.6 J1.8 J1.19 J1.27 R2.2 R4.2 | length 1187.1
  Top w3: C18.2 566.7,422.67 IC2.P$1 ; v1@601.58,454.2 604.23,456.85 604.23,461.81 606.43,464.01 606.43,467.43 C25.2 ; v1(602.34,453.44) 600.82,451.91 600.82,438.18 607.83,431.17 IC2.P$1@607.83,422.79 ; C34.1@606.82,498.18 605.85,497.2 605.85,492.88 606.82,491.91 606.82,474.18 C25.2@610.16,470.84 ; IC2.P$63 652.71,238.94 654.69,236.96 654.69,187.44 C31.1 ; C19.2@676,471 676.67,471 679.55,468.11 679.55,462.45 694,448 v1(694.67,448) ; v1(690.41,356.5) 690.41,353.56 697.59,346.38 IC2.P$29 ; IC2.P$30@719.91,344.72 IC2.P$30
  Top w6: v1(589,297) 591.16,297 595.36,292.8 IC2.P$43 IC2.P$43 ; IC2.P$63 667.01,226.49 v1(668.3,226.49) ; IC2.P$54 652.87,266.77 661.6,275.5 v1(661.76,275.5) ; IC2.P$64 v1@686.24,229.7 ; C24.2 703.87,513 C1.1 ; IC2.P$65 v1@708.68,229.7 ; v1@707.5,333.15 708.34,333.15 IC2.P$30@719.91,344.72 ; IC2.P$66 v1@731.12,229.7 ; IC2.P$67 v1@753.56,229.7 ; IC2.P$58 742.65,266.77 751.5,275.62 v1(751.67,275.62) ; IC2.P$49 v1@753.56,303.84 ; IC2.P$31 742.47,345.76 747.42,350.72 747.42,354.51 v1(748.96,356.04) ; IC2.P$15 764.17,418.4 764.17,421.94 IC2.P$8 765.95,422.67 767.62,421 C26.2 831.53,421 834.53,424 834.53,425.5 837,427.97 837,470.79 v2(839.3,473.08) ; v1(753.56,300.98) IC2.P$50 ; IC2.P$41 v1@776,329.83 ; IC2.P$33 793.2,338.87 801.05,338.87 v1(802.43,337.48) ; v2(829.33,376.9) 844.52,361.71 844.52,349.61 C33.1
  Bottom w3: v2(579.49,134.96) 579.75,134.71 579.75,111.38 C29.1 ; v1@619.39,278.32 v1(620.05,278.98) ; v1(686.38,227.7) 686.69,228.01 C14.2@686.69,240.69 ; C14.2@686.69,242.69 C14.2@687,243 ; J1.19@690.19,402.74 J1.19 ; v1@707.5,333.15 707.5,345.41 708.09,346 C11.2@730,346 ; v1(708.82,227.7) 708.91,227.79 C16.2@708.91,240.91 ; C16.2@708.91,242.91 C16.2@709,243 ; C17.2@731,243 C17.2@731.13,242.87 ; C17.2@731.13,240.87 731.13,227.83 v1(731.26,227.7)
  Bottom w5: C4.2@619.39,261.61 v1@619.39,278.32
  Bottom w6: R4.2 418.3,166.04 409,156.75 C30.1 414.13,100 IC3.2 ; v1(602.34,453.44) 602.34,452.51 608.93,445.92 608.93,423.77 J1.27 ; C23.2 645,291 650.8,291 660.23,281.57 660.23,277.03 v1(661.76,275.5) ; C10.2 787.24,336.24 801.19,336.24 v1(802.43,337.48) ; 789,129 790,130 IC1.2 ; C22.2 v2@829.23,377 ; v2(829.33,376.9) v2@829.23,377 ; v2(839.3,473.08) 839.3,450.69 827.98,439.37 J1.5 827.98,378.25 v2@829.23,377
  other v1: 811.21,221.17 753.7,227.7 776,329.97 483.03,331.39 706,333 717,528
  other v2: 518,29 624,29 853,29 993,29 409,30 747,30 481.13,99.72 537,101 860.47,135.39 650,137 995,140 676,190 404,220 897.5,231.99 486,236 995,255 955,381 995,387 405,397 994,513 597,520 840,520 405,545 994,584 817.03,605.91 500,619 955,619
NetC21_2: C21.2 IC1.6 R1.1 R2.1 | length 70.7
  Top w6: C21.2 902.13,110 902.13,143.43 R2.1@903.7,145
  other v2: 921.47,76.42
NetIC1_3: IC1.3 L3.2 | length 75.5
  Bottom w10: L3.2 L3.2@764.05,167.4
  Bottom w15: L3.2@764.05,167.4 IC1.3
NetIC3_3: IC3.3 Q1.3 R4.1 | length 121.2
  Bottom w6: IC3.3 454.66,166.96 R4.1 455.7,185.7 468.72,198.72 Q1.3
RESET_N: IC1.5 IC2.P$52 R3.1 | length 508.6
  Top w6: v1(589.5,266.78) v1(589.5,266.78) IC2.P$52 IC2.P$52 ; R3.1 940.72,131.88 963.19,131.88 v2(963.91,131.16)
  3-SIG w3: v1(589,208) 589,266.28 v1(589.5,266.78)
  4-SIG w3: v1(589,208) 872,208 948.84,131.16 v2(963.91,131.16)
SPI_MISO: IC2.P$48 J1.15 | length 336
  Top w6: IC2.P$48 v1@731.12,303.84
  3-SIG w3: v1@731.12,303.98 744.14,317 782.3,317 789,323.7 789,348.42 791.72,351.14 791.72,400.68 796.88,405.84 796.88,469.19 792.58,473.5 756.66,473.5 v1(737.23,454.06)
  Bottom w3: J1.15 732.1,423.8 732.1,446.72 737.23,451.85 v1(737.23,454.06)
  other v1: 732,305
SPI_MOSI: J1.17
SPI_SCLK: J1.13
SPI_SSEL: J1.11
VAA: C3.1 C4.1 C5.1 C6.1 C7.1 C8.1 C31.2 C32.2 IC2.P$53 IC2.P$59 IC2.P$61 IC2.P$62 IC2.P$68 IC2.P$69 L4.1 | length 513.4
  Top w6: C32.2 581.54,183 C31.2 624.87,223.88 619.06,229.7 619.18,229.7 IC2.P$62 ; IC2.P$61 v1@618.92,229.7 ; v5(609.28,166.16) 614.15,166.16 621.32,159 705.44,159 v1@776.05,229.61 ; v1(640.51,277) IC2.P$53 IC2.P$62 ; v1@641.36,229.7 IC2.P$62 ; v1(775.6,280.83) 774.07,279.3 774.07,275.94 IC2.P$59 IC2.P$68 765.05,240.79 776.14,229.7 787.23,240.79 IC2.P$69 v1@798.44,251.88
  Bottom w6: v1(619.06,227.7) 619.36,228 C4.1@619.36,240.21 ; C4.1@619.36,242.21 C4.1@619.66,242.51 ; v1(775.6,280.83) 775.8,280.63 775.8,265.2 C3.1
  other v1: 641.5,227.7 776.14,227.7 798.44,252.02
VAA_PIX: C20.1 C33.2 C35.2 IC2.P$51 L5.1 | length 239.9
  Top w6: IC2.P$51 v1@798.44,303.84 ; v1(798.44,300.98) 800.55,300.98 805.95,295.57 833.09,295.57 848.39,310.87 C33.2 867.87,292 ; C35.2@864.42,252.06 867.87,255.51 867.87,292 ; L5.1 930.1,313.97 930.1,299.1 923,292 867.87,292
  Bottom w6: C20.1 798,314.28 798,301.42 v1(798.44,300.98)
VCC: C27.2 IC1.4 J1.2 J1.10 J1.20 J1.30 J1.36 | length 1086.6
  Bottom w6: C27.2 932.13,171.45 IC1.4
  Bottom w8: J1.36 532.97,579 532.97,606.97 541,615 587.07,615 591.76,610.31 ; J1.30 591.76,610.31 ; J1.20 690.19,610.31 ; J1.2 865.84,577.23 865.84,555.37 865,554.53 865,548.69 860.31,544 795,544 788.68,550.32 788.68,578.67 J1.10 788.61,614.39 779,624 703.87,624 690.19,610.31 ; 591.76,610.31 596.45,615 685.5,615 690.19,610.31
  Bottom w10: J1.2@867.87,589.64 868.51,589 931.66,589 975,545.66 975,460.72 975.76,459.96 975.76,222.76 968,215 C27.2
VDD: C1.2 C2.2 C10.1 C11.1 C12.1 C14.1 C16.1 C17.1 C18.1 C19.1 IC2.P$3 IC2.P$10 IC2.P$22 IC2.P$32 IC2.P$44 IC2.P$55 IC2.P$56 IC2.P$57 L1.1 | length 910.6
  Top w3: C18.1 566.16,400.13 576.13,400.13 585,409 620,409 627.57,401.43 627.57,400.97 630.27,398.27 IC2.P$10 651.59,418.01 651.59,421.55 IC2.P$3 652.71,424.09 648.95,427.85 648.95,465.95 650.43,467.43 650.43,468.11 653.31,471 C19.1@654,471
  Top w6: v1(621.56,302.99) 621.56,302.18 630.27,293.48 IC2.P$44 ; C19.1@654,471 654.25,471.25 654.25,487.79 657.76,491.3 693.07,491.3 704.49,479.87 733.41,479.87 C2.2 747.54,504.78 763.87,521.12 L1.1 ; IC2.P$55 675.96,266.77 v1@682.76,273.57 ; v1@685.97,273.57 v1(687.5,275.1) ; v1@688.29,275.89 697.41,266.77 IC2.P$56 IC2.P$57 ; IC2.P$32 v1@776,355.81
  3-SIG w3: v1(721.26,475.37) 723.36,473.27 723.36,468.38 724.11,467.62 724.11,380.11 v1(723,379) 723,376.74 718,371.74 718,338.68 719.5,337.18 719.5,282.08 v1(726.95,274.62)
  3-SIG w5: v1(687.5,275.1) 687.98,274.62 v1(726.95,274.62)
  4-SIG w3: v1@724.96,376.72 732.68,369 762.95,369 v1(776,355.95)
  4-SIG w5: v1(621.56,302.99) 621.05,302.99 603,284.94 603,267 613,257 669,257 687.1,275.1 v1(687.5,275.1)
  Bottom w5: C14.1 C16.1 C17.1
VDD_PHY: C9.1 C13.2 C15.2 IC2.P$21 L2.1 | length 327.4
  Top w6: L2.1 C13.2 517.13,323.12 533.46,306.78 C15.2@533.46,296 ; IC2.P$21 v1@708.68,381.8
  4-SIG w3: v1(516,393) 525,393 549,369 695.74,369 v1@708.68,381.94
  Bottom w3: v1(705,381) 705,371.09 C9.1@707.86,368.23
VDD_REG: C21.1 C28.2 L1.2 L2.2 L3.1 R1.2 | length 1427.1
  Top w6: L2.2 482.87,412.87 517.03,447.03 517.03,539.03 549,571 789,571 798.13,561.87 L1.2 ; v4(714.91,87.49) 749.73,52.66 845.54,52.66 C21.1 867.87,108.43 R1.2
  Top w8: L2.2 480.87,377 478.87,379 446.25,379 441.57,374.31 441.57,128.69 446.25,124 491,124 503,112 503,68 522,49 676.42,49 v4(714.91,87.49)
  Bottom w15: C28.2 675.11,96.65 L3.1
VDDA: C30.2 IC3.1 J1.4 Q1.2 | length 1082.2
  Top w8: v2(481.11,73.89) 478.4,73.89 473.55,78.74 472.26,78.74 423.68,127.32 423.68,398.68 467,442 467,569 485,587 829,587 842.71,600.71 842.71,600.85 847.71,605.85 v2(847.71,608.55)
  Bottom w6: C30.2 412.54,74.41 IC3.1 ; v2(481.11,73.89) 498,90.78 498,161.52 Q1.2@496.24,163.28
VDDIO: C22.1 C23.1 C24.1 C25.1 C26.1 C34.2 C36.2 IC2.P$2 IC2.P$16 IC2.P$18 IC2.P$24 IC2.P$36 L6.1 | length 794.4
  Top w3: C25.1 632,501.87 633.66,501.87 644.78,513 C24.1
  Top w5: IC2.P$2 630.27,469.27 C25.1
  Top w6: IC2.P$18 639.03,379.47 639.03,382.4 v1(640.56,383.93) ; v1(644.18,329.71) 644.18,328.17 652.71,319.64 IC2.P$36 ; IC2.P$24 777.5,383.3 v1@780.14,383.3 ; IC2.P$16 764.91,395.71 v1@772.28,388.34 ; v1(779.16,387.6) 780.14,386.62 v1@780.14,383.3 ; L6.1 926.53,354.6 926.53,364.47 918,373 880,373 872.42,380.58 872.42,414.11 C36.2 855.54,399 C26.1 828.53,399 825.53,396 825.53,395.73 800.8,371 786.94,371 779.88,378.06 779.88,383.03 v1@780.14,383.3
  3-SIG w3: v1(636,482) 636,460.26 639.72,456.54 639.72,384.77 v1(640.56,383.93) 631.23,374.6 631.23,342.65 v1(644.18,329.71)
  4-SIG w6: v1(640.56,383.93) 639.72,384.77 639.72,416.61 646.84,423.74 772.49,423.74 776.63,419.6 776.63,395.11 777.63,394.11 777.63,389.13 v1(779.16,387.6)
  Bottom w6: C23.1 643.09,317.09 643.09,328.62 v1(644.18,329.71)
VDDIO_REG: C29.2 IC1.1 IC3.5 L4.2 L5.2 L6.2 | length 696.9
  Top w6: L5.2 L6.2
  Bottom w6: IC3.5 577.54,74.41 C29.2 608.87,76.87 ; L4.2 620,88 608.87,76.87 ; v2(890.4,332.74) 868,310.34 868,193 878,183 878,107 863.6,92.6 IC1.1 833.82,72.82 818,57 628.75,57 608.87,76.87
pads on no net: FD1.1 FD2.1 FD3.1 FD4.1 FD5.1 FD6.1 FD7.1 FD8.1 H1.P$1 H1.P$2 IC2.P$4 IC2.P$5 IC2.P$6 IC2.P$7 IC2.P$12 IC2.P$13 IC2.P$14 IC2.P$42 IC2.P$60 IC3.4 J1.0 J1.MH1 J1.MH2
copper on no net:
  other v2: 903.75,484 953,484 442.05,484.98 499.37,488.98 443.05,512.98 500.37,516.98 902.75,527 954,527
  other v3: 100.03,325 1300.03,325

## Polygon pours and split planes (outlines as drawn)
GND on 5-GND "GND_L05_P003" (solid, remove dead copper, pour order 3): 1,650 1,0 1402,0 1402,650
GND on 2-GND "GND_L02_P004" (solid, remove dead copper, pour order 4): 1,650 1,0 1402,0 1402,650
GND on Top "GND_L01_P001" (solid, remove dead copper, pour order 1): 365.03,-10 365.03,660 1035.03,660 1035.03,-10
GND on Bottom "GND_L06_P002" (solid, remove dead copper, pour order 2): 1,650 1,0 1402,0 1402,650

## Keep-outs
Keep-Out Layer:
  the board outline again, w5

## Other copper
Top:
  pour cut-out: 579,451 579,212.82 816.75,212.82 816.75,451 583,451
Bottom:
  rectangle: 433.36,476 516,531.59
  rectangle: 890,464.76 964,537.36
  pour cut-out: 424,540.24 522,540.24 522,458.3 424,458.3
  pour cut-out: 885,540.24 964.8,540.24 964.8,458.3 885,458.3

## Silkscreen, mask and mechanical layers (free items; w line width, h text height)
Top Overlay:
  circle w10: c100.03,325 r90.14
  circle w10: c1300.03,325 r90.14
Bottom Overlay:
  text "AR0144 R1" at 970,409 h27.2 r270
  text "openmv.io" at 415.71,399.98 h27.2 r270
Dimension:
  lines w3.94: 1513.46,-103.3 1623.8,-103.3 1837,-103.3 1994.4,-103.3 ; 1513.46,-50.47 1623.8,-50.47 1837,-50.47 1994.4,-50.47 ; 1513.46,2.36 1623.8,2.36 1837,2.36 1994.4,2.36 ; 1513.46,55.19 1623.8,55.19 1837,55.19 1994.4,55.19 ; 1513.46,108.02 1623.8,108.02 1837,108.02 1994.4,108.02 ; 1513.46,160.85 1623.8,160.85 1837,160.85 1994.4,160.85 ; 1513.46,213.68 1623.8,213.68 1837,213.68 1994.4,213.68 ; 1513.46,266.51 1623.8,266.51 1837,266.51 1994.4,266.51 ; 1513.46,319.34 1623.8,319.34 1837,319.34 1994.4,319.34 ; 1513.46,372.17 1623.8,372.17 1837,372.17 1994.4,372.17 ; 1513.46,425 1623.8,425 1837,425 1994.4,425 ; 1513.46,477.83 1623.8,477.83 1837,477.83 1994.4,477.83 ; 1513.46,530.66 1623.8,530.66 1837,530.66 1994.4,530.66 ; 1513.46,583.49 1623.8,583.49 1837,583.49 1994.4,583.49 ; 1513.46,636.32 1994.4,636.32 ; 1623.8,689.15 1623.8,-156.13 ; 1837,689.15 1837,-156.13 ; 1623.8,-156.13 1513.46,-156.13 1513.46,689.15 1994.4,689.15 1994.4,-156.13 1837,-156.13 ; 1623.8,-156.13 1837,-156.13
  text "OpenMV HD-GS-AR0144" at 532.23,674.88 h80
  text "Layer" at 1539.87,649.53 h26.41
  text "Name" at 1650.21,649.53 h26.41
  text "Thickness" at 1863.41,649.53 h26.41
  text "Top Overlay" at 1650.21,596.7 h26.41
  text "Top Solder" at 1650.21,543.87 h26.41
  text "0.010mm" at 1863.41,543.87 h26.41
  text "1" at 1539.87,491.04 h26.41
  text "Top" at 1650.21,491.04 h26.41
  text "0.035mm" at 1863.41,491.04 h26.41
  text "Dielectric 2" at 1650.21,438.21 h26.41
  text "0.127mm" at 1863.41,438.21 h26.41
  text "2" at 1539.84,385.38 h26.41
  text "2-GND" at 1650.19,385.38 h26.41
  text "0.035mm" at 1863.41,385.38 h26.41
  text "Dielectric 4" at 1650.21,332.55 h26.41
  text "0.254mm" at 1863.41,332.55 h26.41
  text "3" at 1539.87,279.72 h26.41
  text "3-SIG" at 1650.21,279.72 h26.41
  text "0.035mm" at 1863.41,279.72 h26.41
  text "Dielectric 1" at 1650.21,226.89 h26.41
  text "0.200mm" at 1863.41,226.89 h26.41
  text "4" at 1539.87,174.06 h26.41
  text "4-SIG" at 1650.21,174.06 h26.41
  text "0.035mm" at 1863.41,174.06 h26.41
  text "Dielectric 5" at 1650.21,121.23 h26.41
  text "0.254mm" at 1863.41,121.23 h26.41
  text "5" at 1539.87,68.4 h26.41
  text "5-GND" at 1650.21,68.4 h26.41
  text "0.035mm" at 1863.41,68.4 h26.41
  text "Dielectric 3" at 1650.21,15.57 h26.41
  text "0.127mm" at 1863.41,15.57 h26.41
  text "TG-170 or equivalent substrate  / Er = 4.3-4.5 @ 1MHz / +/- 10% /  / double side solder mask red / double side silkscreen white /  / 3 mil min trace width and / 3 mil min isolation /  / RoHS required" at 2146.54,-22.93 h30
  text "6" at 1539.87,-37.26 h26.41
  text "Bottom" at 1650.21,-37.26 h26.41
  text "0.035mm" at 1863.41,-37.26 h26.41
  text "Bottom Solder" at 1650.21,-90.09 h26.41
  text "0.010mm" at 1863.41,-90.09 h26.41
  text "Bottom Overlay" at 1650.21,-142.92 h26.41